# Altium PCB DAP-PCB.PcbDoc (part 3 of 5)
Units mm, origin at the board's own origin, x right, y up, seen from the top; angles counter-clockwise.
Board outline 54.75 x 54.75 mm, 6 copper layers (L1 (SIG/PWR), L2 (GND), L3 (SIG), L4 (PWR), L5 (GND), L6 (SIG/PWR)), stack 1.65 mm thick; 270 components, 172 nets, 891 pads, 308 vias.
Unrouted connection lines stored in the file: 5.
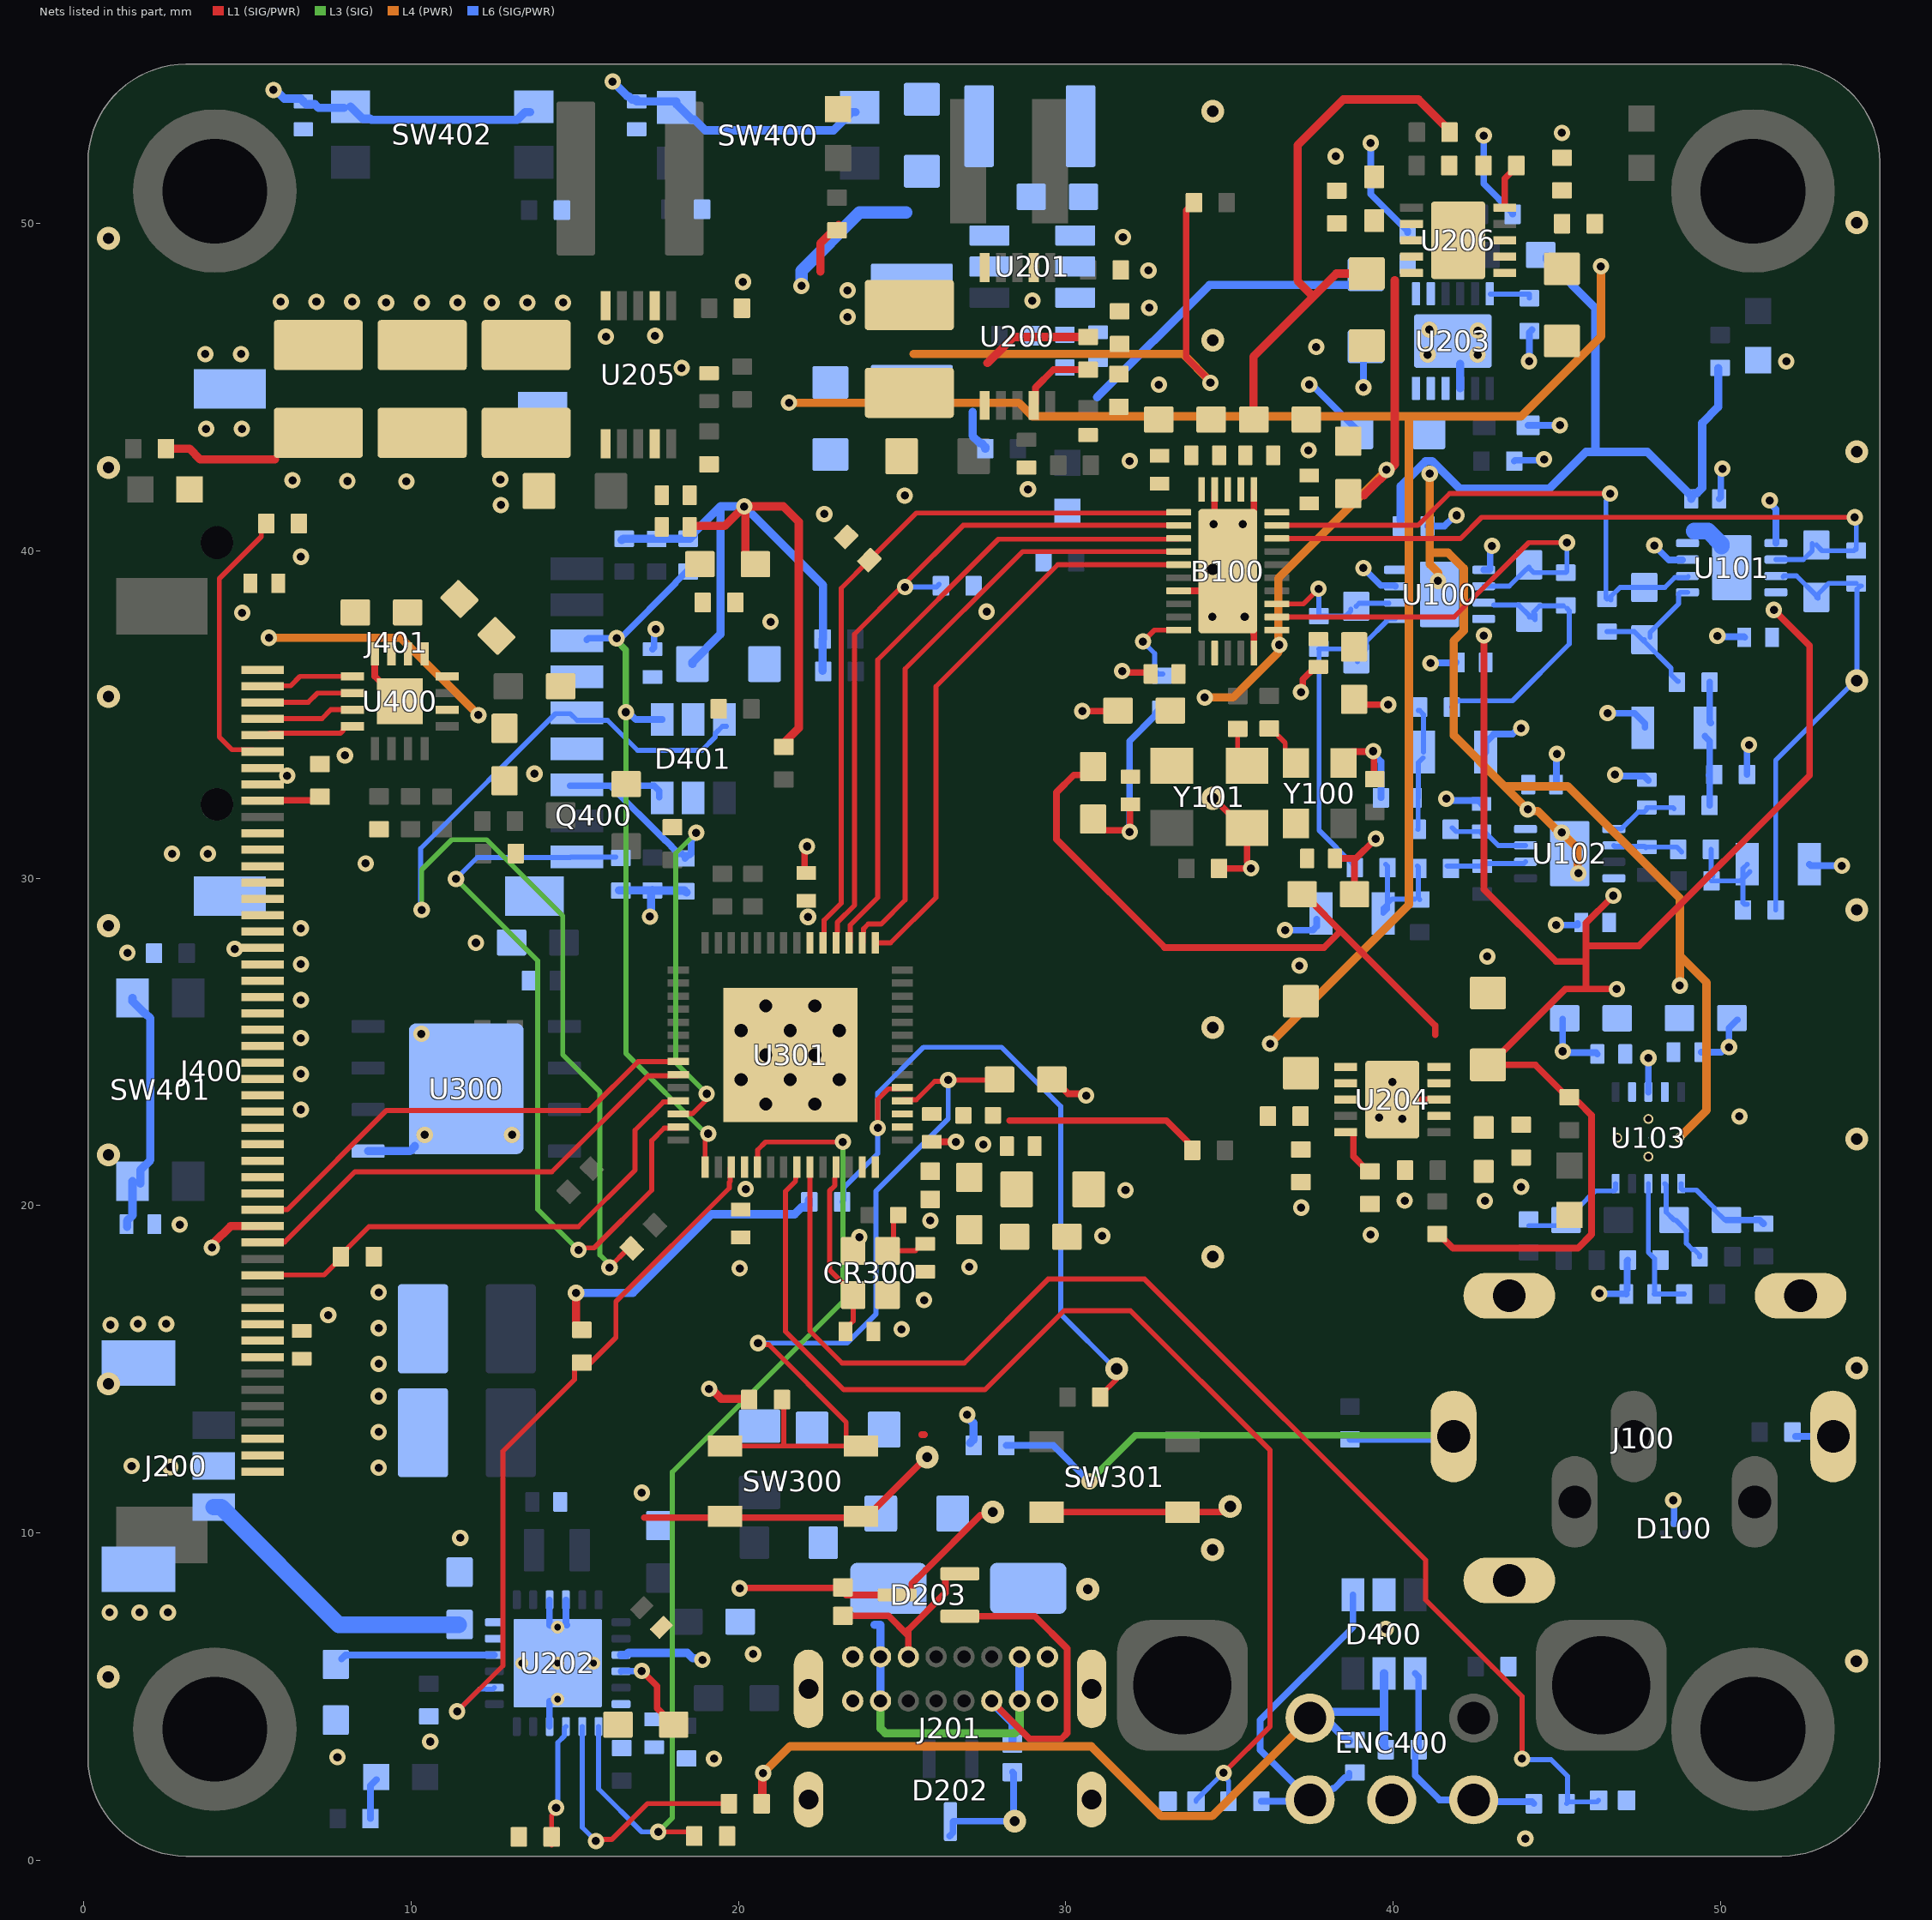
[diagram p6: the nets of this part, all layers, seen from the top]

## Part data (continued)
J400: library part #1-117, <Value>=50-Pin, Manufacturer 1="Amphenol ICC", Manufacturer Part Number 1=F32D-1A7Y1-21050, Package=None, Supplier Part Number 1=609-F32D-1A7Y1-21050CT-ND, <Footprint>=R/A, <Termination>=SMD, AL-PN=#1-117, Check_prices=https://www.snapeda.com/parts/F32D-1A7Y1-21050/Amphenol+FCI/view-part/?ref=eda, Creator Project=DAP, Lead Time="13 Weeks", MF="Amphenol ICC (FCI)", MP=F32D-1A7Y1-21050, PartType=Connector, SnapEDA_Link=https://www.snapeda.com/parts/F32D-1A7Y1-21050/Amphenol+FCI/view-part/?ref=snap, Status=Verified, SubType=FFC, Supplier 1=Digikey, Supplier Label="50 Position FFC, FPC Connector Contacts, Top and Bottom 0.020\" (0.50mm) Surface Mount, Right Angle", Type=Standard
J401: library part #1-126, Manufacturer 1="Same Sky", Manufacturer Part Number 1=MSD-1-A, Package=None, Supplier Part Number 1=2223-MSD-1-ACT-ND, <Termination>=SMD, AL-PN=#1-126, Check_prices=https://www.snapeda.com/parts/MSD-1-A/Same+Sky/view-part/?ref=eda, Creator Project=DAP, Lead Time="8 Weeks", MF="Same Sky", MP=MSD-1-A, PartType=Connector, SnapEDA_Link=https://www.snapeda.com/parts/MSD-1-A/Same+Sky/view-part/?ref=snap, Status=Verified, SubType=Micro-SD, Supplier 1=Digikey, Supplier Label="9 (8 + 1) Position Card Connector microSD™ Surface Mount, Right Angle Gold", Type=Standard
L200: library part #1-076, <Rating>=3.5A, <Tolerance>=0.2, <Value>=6.8uH, Manufacturer 1="Bourns Inc.", Manufacturer Part Number 1=SRP4030FA-6R8M, Supplier Part Number 1=SRP4030FA-6R8MCT-ND, <Spec>=74.1mOhm, <Termination>=SMD, AL-PN=#1-076, Creator Project=DAP, Lead Time="22 Weeks", PartType=Inductor, Status=Verified, SubType=Shielded, Supplier 1=Digikey, Supplier Label="6.8 µH Shielded Drum Core, Wirewound Inductor 4 A 74.1mOhm Max Nonstandard", Type=Standard
L201 L202: library part #1-090, <Rating>=400mA, <Tolerance>=0.2, <Value>=22uH, Manufacturer 1="Murata Electronics", Manufacturer Part Number 1=490-LQW32FT220M2HLTR, Supplier Part Number 1=490-LQW32FT220M2HLCT-ND, <Footprint>=1210, <Spec>=810mOhm, <Termination>=SMD, AL-PN=#1-090, Creator Project=DAP, Lead Time="25 Weeks", PartType=Inductor, Status=Verified, SubType=Shielded, Supplier 1=Digikey, Supplier Label="22 µH Shielded Wirewound Inductor 300 mA 810mOhm Max 1210 (3225 Metric)", Type=Standard
L203: library part #1-063, <Rating>=2A, <Tolerance>=0.2, <Value>=1.0uH, Manufacturer 1=TDK, Manufacturer Part Number 1=TFM141206BLE-1R0MTCA, Supplier Part Number 1=445-TFM141206BLE-1R0MTCACT-ND, <Footprint>=0505, <Spec>=96mOhm, <Termination>=SMD, AL-PN=#1-063, Creator Project=DAP, Lead Time="20 Weeks", PartType=Inductor, Status=Verified, SubType=Shielded, Supplier 1=Digikey, Supplier Label="1 µH Shielded Thin Film Inductor 2 A 96mOhm Max 0505 (1412 Metric)", Type=Standard
L204: library part #1-094, <Rating>=3.7A, <Tolerance>=0.2, <Value>=18uH, Manufacturer 1=Coilcraft, Manufacturer Part Number 1=XGL5050-183MEC, Supplier Part Number 1=2457-XGL5050-183MEC-ND, <Spec>=62.5mOhm, <Termination>=SMD, AL-PN=#1-094, Creator Project=DAP, Lead Time=N/A, PartType=Inductor, Status=Verified, SubType=Shielded, Supplier 1=Digikey, Supplier Label="18 µH Shielded Molded Inductor 4.5 A 62.5mOhm Max Nonstandard", Type=Standard
L300: library part #1-121, <Rating>=1A, <Value>=2nH, Manufacturer 1=TDK, Manufacturer Part Number 1=MHQ1005075HA2N0BTD25, Supplier Part Number 1=445-MHQ1005075HA2N0BTD25CT-ND, <Footprint>=0402, <Spec>=50mOhm, <Termination>=SMD, AL-PN=#1-121, Creator Project=DAP, Lead Time="12 Weeks", PartType=Inductor, Status=Verified, SubType=Shielded, Supplier 1=Digikey, Supplier Label="2 nH Shielded Multilayer Inductor 1 A 50mOhm Max 0402 (1005 Metric)", Type=Standard
L301: library part #1-120, <Rating>=250mA, <Tolerance>=0.03, <Value>=24nH, Manufacturer 1=TDK, Manufacturer Part Number 1=MHQ1005075HA24NHTD25, Supplier Part Number 1=445-MHQ1005075HA24NHTD25CT-ND, <Footprint>=0402, <Spec>=700mOhm, <Termination>=SMD, AL-PN=#1-120, Creator Project=DAP, Lead Time="12 Weeks", PartType=Inductor, Status=Verified, SubType=Shielded, Supplier 1=Digikey, Supplier Label="24 nH Shielded Multilayer Inductor 250 mA 700mOhm Max 0402 (1005 Metric)", Type=Standard
Q400: library part #1-130, <Rating>=2.5Vgs, <Value>=N-Type, Manufacturer 1=MCC, Manufacturer Part Number 1=2N7002-TP, Package="TO-236 MCC", Supplier Part Number 1=2N7002-TPMSCT-ND, <Termination>=SMD, AL-PN=#1-130, Check_prices=https://www.snapeda.com/parts/2N7002-TP/Micro+Commercial/view-part/?ref=eda, Creator Project=DAP, Lead Time=N/A, MF="Micro Commercial", MP=2N7002-TP, PartType=Transistor, SnapEDA_Link=https://www.snapeda.com/parts/2N7002-TP/Micro+Commercial/view-part/?ref=snap, Status=Verified, SubType=MOSFET, Supplier 1=Digikey, Supplier Label="N-Channel 60 V 115mA (Ta) 1.08W Surface Mount SOT-23", Type=Standard
R100 R101 R102 R103 R116 R117 R121 R123 R131 R134: library part #1-105, <Rating>=1/16W, <Tolerance>=0.001, <Value>=499Ohm, Manufacturer 1=YAGEO, Manufacturer Part Number 1=RT0402BRD07499RL, Supplier Part Number 1=YAG1440CT-ND, <Footprint>=0402, <Termination>=SMD, AL-PN=#1-105, Creator Project=DAP, Lead Time="23 Weeks", PartType=Resistor, Status=Verified, Supplier 1=Digikey, Supplier Label="499 Ohms ±0.1% 0.063W, 1/16W Chip Resistor 0402 (1005 Metric) Thin Film", Type=Standard
R104 R105 R303 R304 R305 R306 R307: library part #1-102, <Rating>=1/16W, <Tolerance>=0.01, <Value>=22Ohm, Manufacturer 1=YAGEO, Manufacturer Part Number 1=RC0402FR-0722RL, Supplier Part Number 1=311-22.0LRCT-ND, <Footprint>=0402, <Termination>=SMD, AL-PN=#1-102, Creator Project=DAP, Lead Time="22 Weeks", PartType=Resistor, Status=Verified, Supplier 1=Digikey, Supplier Label="22 Ohms ±1% 0.063W, 1/16W Chip Resistor 0402 (1005 Metric) Moisture Resistant Thick Film", Type=Standard
R106 R107 R111 R112 R113 R119 R129 R135 R208 R209 R210 R211 R216 R221 R223 R242 R300 R301 R400 R401 R402 R403 R404 R405 R406 R407 R408 R412 R413 R414 R415 R416 R417 R418 R419 R422: library part #1-134, <Tolerance>=0.01, <Value>=10kOhm, Manufacturer 1=YAGEO, Manufacturer Part Number 1=AC0402FR-0710KL, Supplier Part Number 1=YAG3436CT-ND, <Footprint>=0402, <Termination>=SMD, AL-PN=#1-134, Creator Project=DAP, Lead Time="22 Weeks", PartType=Resistor, Status=Verified, Supplier 1=Digikey, Supplier Label="10 kOhms ±1% 0.063W, 1/16W Chip Resistor 0402 (1005 Metric) Automotive AEC-Q200, Moisture Resistant Thick Film", Type=Standard
R108 R207 R226 R231 R238 R247: library part #1-138, <Tolerance>=0.001, <Value>=49.9kOhm, Manufacturer 1=YAGEO, Manufacturer Part Number 1=RT0402BRD0749K9L, Supplier Part Number 1=YAG4270CT-ND, <Footprint>=0402, <Termination>=SMD, AL-PN=#1-138, Creator Project=DAP, Lead Time="23 Weeks", PartType=Resistor, Status=Verified, Supplier 1=Digikey, Supplier Label="49.9 kOhms ±0.1% 0.063W, 1/16W Chip Resistor 0402 (1005 Metric) Thin Film", Type=Standard
R114 R115 R126 R133: library part #1-109, <Rating>=1/16W, <Tolerance>=0.001, <Value>=220Ohm, Manufacturer 1=YAGEO, Manufacturer Part Number 1=RT0402BRD07220RL, Supplier Part Number 1=YAG4207CT-ND, <Footprint>=0402, <Termination>=SMD, AL-PN=#1-109, Creator Project=DAP, Lead Time="23 Weeks", PartType=Resistor, Status=Verified, Supplier 1=Digikey, Supplier Label="220 Ohms ±0.1% 0.063W, 1/16W Chip Resistor 0402 (1005 Metric) Thin Film", Type=Standard
R118 R204 R205 R212 R228 R239 R240 R241 R245 R420 R421 R424 R425: library part #1-131, <Tolerance>=0.01, <Value>=100kOhm, Manufacturer 1=YAGEO, Manufacturer Part Number 1=RT0402BRD07100KL, Supplier Part Number 1=YAG1343CT-ND, <Footprint>=0402, <Termination>=SMD, AL-PN=#1-131, Creator Project=DAP, Lead Time="23 Weeks", PartType=Resistor, Status=Verified, Supplier 1=Digikey, Supplier Label="100 kOhms ±0.1% 0.063W, 1/16W Chip Resistor 0402 (1005 Metric) Thin Film", Type=Standard
R120 R122 R124 R132: library part #1-110, <Rating>=1/16W, <Tolerance>=0.001, <Value>=681Ohm, Manufacturer 1=YAGEO, Manufacturer Part Number 1=RT0402BRD07681RL, Supplier Part Number 1=YAG1466CT-ND, <Footprint>=0402, <Termination>=SMD, AL-PN=#1-110, Creator Project=DAP, Lead Time="23 Weeks", PartType=Resistor, Status=Verified, Supplier 1=Digikey, Supplier Label="681 Ohms ±0.1% 0.063W, 1/16W Chip Resistor 0402 (1005 Metric) Thin Film", Type=Standard
R125 R127: library part #1-113, <Rating>=1/16W, <Tolerance>=0.001, <Value>=4.7Ohm, Manufacturer 1=YAGEO, Manufacturer Part Number 1=RT0402BRE074R7L, Supplier Part Number 1=13-RT0402BRE074R7LCT-ND, <Footprint>=0402, <Termination>=SMD, AL-PN=#1-113, Creator Project=DAP, Lead Time="23 Weeks", PartType=Resistor, Status=Verified, Supplier 1=Digikey, Supplier Label="4.7 Ohms ±0.1% 0.063W, 1/16W Chip Resistor 0402 (1005 Metric) Thin Film", Type=Standard
R128 R203 R237: library part #1-079, <Rating>=1/16W, <Tolerance>=0.001, <Value>=54.9kOhm, Manufacturer 1=YAGEO, Manufacturer Part Number 1=RT0402BRD0754K9L, Supplier Part Number 1=YAG1452CT-ND, <Footprint>=0402, <Termination>=SMD, AL-PN=#1-079, Creator Project=DAP, Lead Time="20 Weeks", PartType=Resistor, Status=Verified, Supplier 1=Digikey, Supplier Label="54.9 kOhms ±0.1% 0.063W, 1/16W Chip Resistor 0402 (1005 Metric) Thin Film", Type=Standard
R200: library part #1-074, <Rating>=1/16W, <Tolerance>=0.001, <Value>=220kOhm, Manufacturer 1=YAGEO, Manufacturer Part Number 1=RC0402BR-07220KL, Supplier Part Number 1=13-RC0402BR-07220KLCT-ND, <Footprint>=0402, <Termination>=SMD, AL-PN=#1-074, Creator Project=DAP, Lead Time="17 Weeks", PartType=Resistor, Status=Verified, Supplier 1=Digikey, Supplier Label="220 kOhms ±0.1% 0.063W, 1/16W Chip Resistor 0402 (1005 Metric) Moisture Resistant Thick Film", Type=Standard
R201: library part #1-091, <Rating>=1/16W, <Tolerance>=0.001, <Value>=309kOhm, Manufacturer 1=YAGEO, Manufacturer Part Number 1=RE0402BRE07309KL, Supplier Part Number 1=13-RE0402BRE07309KLCT-ND, <Footprint>=0402, <Termination>=SMD, AL-PN=#1-091, Creator Project=DAP, Lead Time="20 Weeks", PartType=Resistor, Status=Verified, Supplier 1=Digikey, Supplier Label="309 kOhms ±0.1% 0.063W, 1/16W Chip Resistor 0402 (1005 Metric) Thick Film", Type=Standard
R202: library part #1-067, <Rating>=0.1W, <Tolerance>=0.005, <Value>=274kOhm, Manufacturer 1=YAGEO, Manufacturer Part Number 1=RT0603DRE07274KL, Supplier Part Number 1=13-RT0603DRE07274KLCT-ND, <Footprint>=0603, <Termination>=SMD, AL-PN=#1-067, Creator Project=DAP, Lead Time="20 Weeks", PartType=Resistor, Status=Verified, Supplier 1=Digikey, Supplier Label="RES SMD 274K OHM 0.5% 1/10W 0603", Type=Standard
R206 R229 R246 R249 R250 R251 R252 R253 R302: library part #1-043, <Rating>=1/16W, <Tolerance>=0.001, <Value>=1kOhm, Manufacturer 1=YAGEO, Manufacturer Part Number 1=RT0402BRD071KL, Supplier Part Number 1=YAG1386TR-ND, <Footprint>=0402, <Termination>=SMD, AL-PN=#1-043, Creator Project=aRTy, Lead Time="20 Weeks", PartType=Resistor, Status=Verified, Supplier 1=Digikey, Supplier Label="1 kOhms ±0.1% 0.063W, 1/16W Chip Resistor 0402 (1005 Metric) Thin Film", Type=Standard
R213 R224: library part #1-078, <Rating>=1/16W, <Tolerance>=0.001, <Value>=15kOhm, Manufacturer 1=YAGEO, Manufacturer Part Number 1=RT0402BRD0715KL, Supplier Part Number 1=YAG2302CT-ND, <Footprint>=0402, <Termination>=SMD, AL-PN=#1-078, Creator Project=DAP, Lead Time="20 Weeks", PartType=Resistor, Status=Verified, Supplier 1=Digikey, Supplier Label="15 kOhms ±0.1% 0.063W, 1/16W Chip Resistor 0402 (1005 Metric) Thin Film", Type=Standard
R214: library part #1-060, <Rating>=1/16W, <Tolerance>=0.01, <Value>=5kOhm, Manufacturer 1=YAGEO, Manufacturer Part Number 1=RC0402FR-075KL, Supplier Part Number 1=13-RC0402FR-075KLCT-ND, <Footprint>=0402, <Termination>=SMD, AL-PN=#1-060, Creator Project=DAP, Lead Time="17 Weeks", PartType=Resistor, Status=Verified, Supplier 1=Digikey, Supplier Label="5 kOhms ±1% 0.063W, 1/16W Chip Resistor 0402 (1005 Metric) Moisture Resistant Thick Film", Type=Standard
R215: library part #1-061, <Rating>=1/16W, <Tolerance>=0.005, <Value>=9.88kOhm, Manufacturer 1=YAGEO, Manufacturer Part Number 1=RT0402DRD079K88L, Supplier Part Number 1=311-2214-1-ND, <Footprint>=0402, <Termination>=SMD, AL-PN=#1-061, Creator Project=DAP, Lead Time="20 Weeks", PartType=Resistor, Status=Verified, Supplier 1=Digikey, Supplier Label="9.88 kOhms ±0.5% 0.063W, 1/16W Chip Resistor 0402 (1005 Metric) Thin Film", Type=Standard
R217: library part #1-065, <Rating>=0.1W, <Tolerance>=0.01, <Value>=270Ohm, Manufacturer 1=YAGEO, Manufacturer Part Number 1=RC0603FR-07270RL, Supplier Part Number 1=311-270HRCT-ND, <Footprint>=0603, <Termination>=SMD, AL-PN=#1-065, Creator Project=DAP, Lead Time="17 Weeks", PartType=Resistor, Status=Verified, Supplier 1=Digikey, Supplier Label="270 Ohms ±1% 0.1W, 1/10W Chip Resistor 0603 (1608 Metric) Moisture Resistant Thick Film", Type=Standard
R218: library part #1-064, <Rating>=0.1W, <Tolerance>=0.001, <Value>=500Ohm, Manufacturer 1=YAGEO, Manufacturer Part Number 1=RT0603BRC07500RL, Supplier Part Number 1=13-RT0603BRC07500RLCT-ND, <Footprint>=0603, <Termination>=SMD, AL-PN=#1-064, Creator Project=DAP, Lead Time="20 Weeks", PartType=Resistor, Status=Verified, Supplier 1=Digikey, Supplier Label="500 Ohms ±0.1% 0.1W, 1/10W Chip Resistor 0603 (1608 Metric) Thin Film", Type=Standard
R219: library part #1-087, <Rating>=1/16W, <Tolerance>=0.01, <Value>=88.7kOhm, Manufacturer 1=YAGEO, Manufacturer Part Number 1=RC0402FR-0788K7L, Supplier Part Number 1=311-88.7KLRCT-ND, <Footprint>=0402, <Termination>=SMD, AL-PN=#1-087, Creator Project=DAP, Lead Time="17 Weeks", PartType=Resistor, Status=Verified, Supplier 1=Digikey, Supplier Label="88.7 kOhms ±1% 0.063W, 1/16W Chip Resistor 0402 (1005 Metric) Moisture Resistant Thick Film", Type=Standard
R220: library part #1-086, <Rating>=1/10W, <Tolerance>=0.001, <Value>=135kOhm, Manufacturer 1=YAGEO, Manufacturer Part Number 1=RT0603BRD07135KL, Supplier Part Number 1=13-RT0603BRD07135KLCT-ND, <Footprint>=0603, <Termination>=SMD, AL-PN=#1-086, Creator Project=DAP, Lead Time="20 Weeks", PartType=Resistor, Status=Verified, Supplier 1=Digikey, Supplier Label="135 kOhms ±0.1% 0.1W, 1/10W Chip Resistor 0603 (1608 Metric) Thin Film", Type=Standard
R222 R243: library part #1-083, <Rating>=1/16W, <Tolerance>=0.01, <Value>=909kOhm, Manufacturer 1=YAGEO, Manufacturer Part Number 1=RC0402FR-07909KL, Supplier Part Number 1=YAG2377CT-ND, <Footprint>=0402, <Termination>=SMD, AL-PN=#1-083, Creator Project=DAP, Lead Time="17 Weeks", PartType=Resistor, Status=Verified, Supplier 1=Digikey, Supplier Label="909 kOhms ±1% 0.063W, 1/16W Chip Resistor 0402 (1005 Metric) Moisture Resistant Thick Film", Type=Standard
R225 R244: library part #1-084, <Rating>=1/16W, <Tolerance>=0.001, <Value>=90.9kOhm, Manufacturer 1=YAGEO, Manufacturer Part Number 1=RT0402BRD0790K9L, Supplier Part Number 1=YAG1489CT-ND, <Footprint>=0402, <Termination>=SMD, AL-PN=#1-084, Creator Project=DAP, Lead Time="20 Weeks", PartType=Resistor, Status=Verified, Supplier 1=Digikey, Supplier Label="90.9 kOhms ±0.1% 0.063W, 1/16W Chip Resistor 0402 (1005 Metric) Thin Film", Type=Standard
R227: library part #1-097, <Rating>=1/4W, <Tolerance>=0.01, <Value>=0.5Ohms, Manufacturer 1=YAGEO, Manufacturer Part Number 1=PE0805FRF7W0R5L, Supplier Part Number 1=13-PE0805FRF7W0R5LCT-ND, <Footprint>=0805, <Termination>=SMD, AL-PN=#1-097, Creator Project=DAP, Lead Time="20 Weeks", PartType=Resistor, Status=Verified, Supplier 1=Digikey, Supplier Label="500 mOhms ±1% 0.25W, 1/4W Chip Resistor 0805 (2012 Metric) Automotive AEC-Q200, Current Sense Metal Film", Type=Standard
R230: library part #1-088, <Rating>=1/16W, <Tolerance>=0.01, <Value>=15.4kOhm, Manufacturer 1=YAGEO, Manufacturer Part Number 1=RT0402BRD0715K4L, Supplier Part Number 1=YAG4177CT-ND, <Footprint>=0402, <Termination>=SMD, AL-PN=#1-088, Creator Project=DAP, Lead Time="20 Weeks", PartType=Resistor, Status=Verified, Supplier 1=Digikey, Supplier Label="15.4 kOhms ±0.1% 0.063W, 1/16W Chip Resistor 0402 (1005 Metric) Thin Film", Type=Standard
R232 R233 R248: library part #1-085, <Rating>=1/16W, <Tolerance>=0.001, <Value>=33.2kOhm, Manufacturer 1=YAGEO, Manufacturer Part Number 1=RT0402BRD0733K2L, Supplier Part Number 1=YAG4244CT-ND, <Footprint>=0402, <Termination>=SMD, AL-PN=#1-085, Creator Project=DAP, Lead Time="20 Weeks", PartType=Resistor, Status=Verified, Supplier 1=Digikey, Supplier Label="33.2 kOhms ±0.1% 0.063W, 1/16W Chip Resistor 0402 (1005 Metric) Thin Film", Type=Standard
R234 R235: library part #1-024, <Rating>=1/16W, <Tolerance>=0.001, <Value>=5.1kOhm, Manufacturer 1=YAGEO, Manufacturer Part Number 1=RT0402BRE075K1L, Supplier Part Number 1=YAG4404TR-ND, <Footprint>=0402, <Termination>=SMD, AL-PN=#1-024, Creator Project=aRTy, Lead Time="20 Weeks", PartType=Resistor, Status=Verified, Supplier 1=Digikey, Supplier Label="5.1 kOhms ±0.1% 0.063W, 1/16W Chip Resistor 0402 (1005 Metric) Thin Film", Type=Standard
R236: library part #1-095, <Rating>=1/10W, <Tolerance>=0.001, <Value>=172kOhm, Manufacturer 1=YAGEO, Manufacturer Part Number 1=RT0603BRD07172KL, Supplier Part Number 1=13-RT0603BRD07172KLCT-ND, <Footprint>=0603, <Termination>=SMD, AL-PN=#1-095, Creator Project=DAP, Lead Time="20 Weeks", PartType=Resistor, Status=Verified, Supplier 1=Digikey, Supplier Label="172 kOhms ±0.1% 0.1W, 1/10W Chip Resistor 0603 (1608 Metric) Thin Film", Type=Standard
R308: library part #1-123, <Rating>=1/16W, <Tolerance>=0.001, <Value>=1MOhm, Manufacturer 1=YAGEO, Manufacturer Part Number 1=RE0402BRE071ML, Supplier Part Number 1=13-RE0402BRE071MLCT-ND, <Footprint>=0402, <Termination>=SMD, AL-PN=#1-123, Creator Project=DAP, Lead Time="20 Weeks", PartType=Resistor, Status=Verified, Supplier 1=Digikey, Supplier Label="1 MOhms ±0.1% 0.063W, 1/16W Chip Resistor 0402 (1005 Metric) Thick Film", Type=Standard
R423: library part #1-133, <Tolerance>=0.01, <Value>=32.4kOhm, Manufacturer 1=YAGEO, Manufacturer Part Number 1=RC0402FR-0732K4L, Supplier Part Number 1=YAG3119CT-ND, <Footprint>=0402, <Termination>=SMD, AL-PN=#1-133, Creator Project=DAP, Lead Time="22 Weeks", PartType=Resistor, Status=Verified, Supplier 1=Digikey, Supplier Label="32.4 kOhms ±1% 0.063W, 1/16W Chip Resistor 0402 (1005 Metric) Moisture Resistant Thick Film", Type=Standard
SW300 SW301: library part #1-115, <Value>=SPST, Manufacturer 1=C&K, Manufacturer Part Number 1="PTS810SJM250SMTR LFS", Package=None, Supplier Part Number 1=CKN10502CT-ND, <Footprint>=Vert, <Termination>=SMD, AL-PN=#1-115, Check_prices=https://www.snapeda.com/parts/PTS810%20SJM%20250%20SMTR%20LFS/C%2526K/view-part/?ref=eda, Creator Project=DAP, Lead Time="16 Weeks", MF=C&K, MP="PTS810 SJM 250 SMTR LFS", PartType=Switch, SnapEDA_Link=https://www.snapeda.com/parts/PTS810%20SJM%20250%20SMTR%20LFS/C%2526K/view-part/?ref=snap, Status=Verified, SubType=Tacticle, Supplier 1=Digikey, Supplier Label="Tactile Switch SPST-NO Top Actuated Surface Mount", Type=Standard
SW400 SW401 SW402: library part #1-114, <Value>=SPST, Manufacturer 1=E-Switch, Manufacturer Part Number 1=TL1014BF220QG, Supplier Part Number 1=141-TL1014BF220QGCT-ND, <Footprint>=R/A, <Termination>=SMD, AL-PN=#1-114, Creator Project=DAP, Lead Time="7 Weeks", PartType=Switch, Status=Verified, SubType=Tacticle, Supplier 1=Digikey, Supplier Label="Tactile Switch SPST-NO Side Actuated Surface Mount, Right Angle", Type=Standard
U100 U101 U102: library part #1-104, Manufacturer 1="Texas Instruments", Manufacturer Part Number 1=OPA1612AIDRGR, Supplier Part Number 1=296-38367-1-ND, <Termination>=SMD, AL-PN=#1-104, Creator Project=DAP, Lead Time="16 Weeks", PartType=IC, Status=Verified, SubType=Op-Amp, Supplier 1=Digikey, Supplier Label="Audio Amplifier 2 Circuit Rail-to-Rail 8-SON (3x3)", Type=Standard
U103: library part #1-056, Manufacturer 1="Texas Instruments", Manufacturer Part Number 1=OPA1622IDRCR, Package="VSON-10 Texas Instruments", Supplier Part Number 1=296-45038-1-ND, <Termination>=SMD, AL-PN=#1-056, Check_prices=https://www.snapeda.com/parts/OPA1622IDRCR/Texas+Instruments/view-part/?ref=eda, Creator Project=DAP, Lead Time="16 Weeks", MF="Texas Instruments", MP=OPA1622IDRCR, PartType=IC, SnapEDA_Link=https://www.snapeda.com/parts/OPA1622IDRCR/Texas+Instruments/view-part/?ref=snap, Status=Verified, SubType=Op-Amp, Supplier 1=Digikey, Supplier Label="Audio Amplifier 2 Circuit 10-VSON (3x3)", Type=Standard
U200 U205: library part #1-050, Manufacturer 1="Analog Devices", Manufacturer Part Number 1=LTC3440EMS#TRPBF, Package="MSOP-10 Linear Technology", Supplier Part Number 1=LTC3440EMS#TRPBFCT-ND, <Termination>=SMD, AL-PN=#1-050, Check_prices=https://www.snapeda.com/parts/LTC3440EMS%23TRPBF/Analog+Devices/view-part/?ref=eda, Creator Project=DAP, Lead Time="21 Weeks", MF="Analog Devices", MP=LTC3440EMS#TRPBF, PartType=IC, SnapEDA_Link=https://www.snapeda.com/parts/LTC3440EMS%23TRPBF/Analog+Devices/view-part/?ref=snap, Status=Verified, SubType=Buck-Boost, Supplier 1=Digikey, Supplier Label="Buck-Boost Switching Regulator IC Positive Adjustable 2.5V 1 Output 600mA 10-TFSOP, 10-MSOP (0.118\", 3.00mm Width)", Type=Standard
U201: library part #1-089, Manufacturer 1="Analog Devices", Manufacturer Part Number 1=LT3462AES6#TRPBF, Manufacturer_Name="Analog Devices Inc", Manufacturer_Part_Number=LT3093EDD#TRPBF, Supplier Part Number 1=LT3462AES6#TRPBFCT-ND, <Termination>=SMD, AL-PN=#1-089, Copyright="Copyright (C) 2026 Ultra Librarian. All rights reserved.", Creator Project=DAP, Lead Time="10 Weeks", PartType=IC, RefDes=RefDes, Status=Verified, SubType=Regulator, Supplier 1=Digikey, Supplier Label="Cuk Switching Regulator IC Negative Adjustable -1.265V 1 Output 250mA SOT-23-6 Thin, TSOT-23-6", Type=Standard
U202: library part #1-054, Manufacturer 1="Texas Instruments", Manufacturer Part Number 1=BQ24250RGET, Package="VQFN-24 Texas Instruments", Supplier Part Number 1=296-36180-1-ND, <Termination>=SMD, AL-PN=#1-054, Check_prices=https://www.snapeda.com/parts/BQ24250RGET/Texas+Instruments/view-part/?ref=eda, Creator Project=DAP, Lead Time="16 Weeks", MF="Texas Instruments", MP=BQ24250RGET, PartType=IC, SnapEDA_Link=https://www.snapeda.com/parts/BQ24250RGET/Texas+Instruments/view-part/?ref=snap, Status=Verified, SubType=Charger, Supplier 1=Digikey, Supplier Label="Charger IC Lithium Ion 24-VQFN (4x4)", Type=Standard
U203: library part #1-052, Manufacturer 1="Analog Devices", Manufacturer Part Number 1=LT3093EDD#TRPBF, Manufacturer_Name="Analog Devices Inc", Supplier Part Number 1=505-LT3093EDD#TRPBFCT-ND, <Termination>=SMD, AL-PN=#1-052, Copyright="Copyright (C) 2026 Ultra Librarian. All rights reserved.", Creator Project=DAP, Lead Time="21 Weeks", Manufacturer_Part_Number=LT3093EDD#TRPBF, PartType=IC, RefDes=RefDes, Status=Verified, SubType=LDO, Supplier 1=Digikey, Supplier Label="Linear Voltage Regulator IC Negative Adjustable 1 Output 200mA 12-DFN (3x3)", Type=Standard
U204 U206: library part #1-051, Manufacturer 1="Analog Devices", Manufacturer Part Number 1=LT3042EDD#PBF, Package="DFN-10 Linear Technology", Supplier Part Number 1=505-LT3042EDD#PBF-ND, <Termination>=SMD, AL-PN=#1-051, Check_prices=https://www.snapeda.com/parts/LT3042EDD%23PBF/Analog+Devices/view-part/?ref=eda, Creator Project=DAP, Lead Time="21 Weeks", MF="Analog Devices", MP=LT3042EDD#PBF, PartType=IC, SnapEDA_Link=https://www.snapeda.com/parts/LT3042EDD%23PBF/Analog+Devices/view-part/?ref=snap, Status=Verified, SubType=LDO, Supplier 1=Digikey, Supplier Label="Linear Voltage Regulator IC Positive Adjustable 1 Output 200mA 10-DFN (3x3)", Type=Standard
U300: library part #1-124, <Rating>=133MHz, <Value>=64Bit, Manufacturer 1="Gigadevice Electronics Singapore PTE.LTD.", Manufacturer Part Number 1=GD25B64EWIGR, Supplier Part Number 1=1970-GD25B64EWIGRCT-ND, <Termination>=SMD, AL-PN=#1-124, Creator Project=DAP, Lead Time=N/A, PartType=IC, Status=Verified, SubType=FLASH, Supplier 1=Digikey, Supplier Label="FLASH - NOR (SLC) Memory IC 64Mbit SPI - Quad I/O 133 MHz 7 ns 8-WSON (5x6)", Type=Standard
U301: library part #1-055, Manufacturer 1="Espressif Technologies", Package=None, Supplier Part Number 1=1965-ESP32-S3-ND, <Termination>=SMD, AL-PN=#1-055, Availability="In Stock", Check_prices=https://www.snapeda.com/parts/ESP32-S3/Espressif+Systems/view-part/?ref=eda, Creator Project=DAP, Lead Time="8 Weeks", Manufacturer Part Number 1=ESP32-S3, MF="Espressif Systems", MP=ESP32-S3, PartType=MCU, Price=None, Purchase-URL=https://pricing.snapeda.com/search/part/ESP32-S3/?ref=eda, SnapEDA_Link=https://www.snapeda.com/parts/ESP32-S3/Espressif+Systems/view-part/?ref=snap, Status=Verified, SubType=ESP-32, Supplier 1=Digikey, Supplier Label="IC RF TxRx + MCU Bluetooth, WiFi 802.11b/g/n, Bluetooth v5.0 2.412GHz ~ 2.484GHz 56-VFQFN Exposed Pad", Type=Standard
U400: library part #1-128, Manufacturer 1="Rohm Semiconductor", Manufacturer Part Number 1=BD1604MUV-E2, Manufacturer_Name="ROHM Semiconductor", Supplier Part Number 1=BD1604MUV-E2CT-ND, <Termination>=SMD, AL-PN=#1-128, Copyright="Copyright (C) 2025 Ultra Librarian. All rights reserved.", Creator Project=DAP, Lead Time="12 Weeks", Manufacturer_Part_Number=BD1604MUV-E2, PartType=IC, RefDes=RefDes, Status=Verified, SubType="LED Driver", Supplier 1=Digikey, Supplier Label="LED Driver IC 4 Output DC DC Regulator Switched Capacitor (Charge Pump) Dimming 30mA VQFN016V3030", Type=Standard
Y100: library part #1-100, <Rating>=2.2mA, <Value>=22.5792MHz, Manufacturer 1="ECS Inc.", Manufacturer Part Number 1=ECS-2520MVLC-225.792-CN-TR, Package=None, Supplier Part Number 1=50-ECS-2520MVLC-225.792-CN-TRCT-ND, <Termination>=SMD, AL-PN=#1-100, Availability=Unavailable, Creator Project=DAP, Lead Time="19 Weeks", MP=ASTX-H11-24.576MHZ-T, PartType=Oscillator, Price=None, Status=Verified, SubType=Crystal, Supplier 1=Digikey, Supplier Label="22.5792 MHz XO (Standard) CMOS Oscillator 1.6V ~ 3.6V Enable/Disable 4-SMD, No Lead", Type=Standard
Y101: library part #1-101, <Rating>=5.5mA, <Value>=24.576MHz, Manufacturer 1="Abracon LLC", Manufacturer Part Number 1=ASTX-H11-24.576MHZ-T, Package=None, Supplier Part Number 1=535-12038-1-ND, <Termination>=SMD, AL-PN=#1-101, Availability=Unavailable, Creator Project=DAP, Lead Time="16 Weeks", MP=ASTX-H11-24.576MHZ-T, PartType=Oscillator, Price=None, Status=Verified, SubType=Crystal, Supplier 1=Digikey, Supplier Label="24.576 MHz TCXO HCMOS Oscillator 3.3V Enable/Disable 4-SMD, No Lead", Type=Standard

## Free pads (board coordinates)
  round 5 hole 3.2: ""(4,4) ""(4,51) ""(51,4) ""(51,51)

## Via types
v1: diameter 0.5, hole 0.25, L1 (SIG/PWR) to L6 (SIG/PWR), tented both sides, 268 vias
v2: diameter 0.7, hole 0.35, L1 (SIG/PWR) to L6 (SIG/PWR), tented both sides, 23 vias
v3: diameter 0.7, hole 0.3, L1 (SIG/PWR) to L6 (SIG/PWR), tented both sides, 6 vias
v4: diameter 1.25, hole 0.75, L1 (SIG/PWR) to L6 (SIG/PWR), 6 vias
v5: diameter 0.4/0.4/0.4/0.4/0.4/0.4 (per signal layer), hole 0.2, L1 (SIG/PWR) to L6 (SIG/PWR), tented both sides, 5 vias

## Nets (pads, with @x,y where several pads share a name; then routed paths per layer and width w, separated by ;. In a path a pad name is that pad's centre, name@x,y a point inside that pad or via, vN(x,y) a via of type N, cw(c..) or ccw(c..) an arc to the next point about the centre after c; other vN are vias at no path point)
22.5792_OUT: R104.1 Y100.3 | length 1.3
  L1 (SIG/PWR) w0.152: R104.1@36.22,34.577 36.27,34.577 36.709,34.138 36.709,33.898 36.723,33.884 Y100.3@37.059,33.884
24.576_OUT: R105.2 Y101.3 | length 1.4
  L1 (SIG/PWR) w0.152: R105.2@35.255,34.569 35.255,33.35 Y101.3@35.433,33.35
40MHz_IN: C308.1 CR300.1 L301.1 | length 2.4
  L1 (SIG/PWR) w0.152: CR300.1@24.555,18.621 25.409,18.621 25.584,18.796 C308.1@25.781,18.796 ; CR300.1@24.562,18.669 24.741,18.849 L301.1@24.741,19.709
40MHz_OUT: C310.1 CR300.3 U301.53 | length 5.4
  L1 (SIG/PWR) w0.152: U301.53@22.984,21.178 22.95,21.144 22.95,20.842 22.948,20.839 22.948,20.613 22.784,20.449 22.784,18.043 23.495,17.332 CR300.3@23.495,17.145 ; C310.1@23.266,16.205 23.266,16.235 23.505,16.474 CR300.3@23.505,17.145
+3V3_ANALOG: C102.2 C103.2 C104.2 C105.2 C109.2 C111.2 C126.2 C128.2 C129.2 C217.2 R222.2 R251.2 U100.8 U101.8 U102.8 U103.2 U204.9 U204.10 Y100.4 Y101.4 | length 65.4
  L1 (SIG/PWR) w0.203: C105.2@30.836,33.414 30.58,33.158 30.25,33.158 29.718,32.626 29.718,31.191 33.021,27.888 37.895,27.888 38.398,28.39 ; C102.2@37.465,29.312 37.477,29.312 38.398,28.39 ; 41.291,25.223 41.291,25.498 38.398,28.39 ; R222.2@41.351,19.134 41.401,19.134 41.834,18.702 45.651,18.702 46.069,19.12 46.069,22.76 45.669,23.161 45.588,23.161 45.568,23.181 R251.2@45.568,23.262 ; v1@42.799,37.414 42.778,37.394 42.778,29.662 44.983,27.457 45.898,27.457 ; C217.2@42.901,24.3 44.349,24.3 45.288,23.361 R251.2@45.288,23.292 ; C217.2@42.951,24.3 45.27,26.619 45.898,26.619 ; v1@46.711,29.413 46.677,29.413 45.898,28.634 45.898,27.94 ; v1@46.812,26.619 45.898,26.619 ; v1@51.765,38.227 51.735,38.197 51.735,38.105 52.73,37.109 52.73,33.147 47.523,27.94 45.898,27.94 ; 45.898,26.619 45.898,27.457 ; 45.898,27.457 45.898,27.94
  other v1: 46.838,26.619 46.733,29.47 42.778,37.419 51.638,38.202
+3V3_DAC: B100.1 B100.10 B100.12 B100.27 C112.2 C113.2 C114.2 C115.2 C116.2 C119.2 C120.2 C139.2 C231.2 R243.2 U206.9 U206.10 | length 33.5
  L1 (SIG/PWR) w0.254: C120.2@35.738,44.12 35.738,45.949 37.567,47.777 ; 39.116,41.707 40.052,42.643 40.052,48.279 ; C231.2@39.198,48.48 38.27,48.48 37.567,47.777 ; R243.2@41.808,52.959 41.619,52.959 40.781,53.797 38.481,53.797 37.084,52.4 37.084,48.26 37.567,47.777
  L4 (PWR) w0.254: v1(34.248,35.527) 35.121,35.527 36.5,36.906 36.5,39.179 v1@39.802,42.481
  other v1: 36.525,37.135 39.802,42.481
+3V3_DIG: B100.13 C121.2 C122.2 C225.2 C227.2 C228.2 C229.2 C300.2 C301.2 C303.2 C304.2 C305.2 C306.2 C307.2 C401.2 C402.2 C403.2 C407.2 C408.2 C409.2 D400.5 D401.5 ENC400.4 J400.7 J400.8 J400.35 J400.40 J400.41 J400.42 J401.4 L300.2 R118.2 R208.2 R209.2 R210.2 R211.2 R223.2 R236.2 R241.2 R242.2 R253.2 R300.2 R301.2 R405.2 R407.2 R414.2 R415.2 R416.2 R417.2 R418.2 R419.1 SW400.2 SW400.4 SW401.2 SW401.4 SW402.2 SW402.4 U205.6 U301.20 U301.46 U301.55 U301.56 | length 119.2
  L1 (SIG/PWR) w0.203: 28.293,22.599 33.078,22.599 R223.2@33.807,21.869 ; R242.2@33.866,50.648 33.866,50.598 33.68,50.412 33.68,45.921 34.421,45.181 v1(34.421,45.144)
  L1 (SIG/PWR) w0.254: R253.2@2.565,43.104 2.591,43.129 3.226,43.129 3.556,42.799 5.835,42.799 ; v1(3.912,18.72) 3.959,18.767 3.959,18.853 4.479,19.373 J400.35@5.461,19.373 ; v1(15.038,17.332) 15.038,16.701 15.042,16.698 15.042,16.327 R210.2@15.113,16.256 ; C225.2@18.618,40.767 19.582,40.767 v1(20.18,41.365) ; v1(19.101,14.402) 19.167,14.402 19.472,14.097 20.205,14.097 20.23,14.072 R300.2@20.328,14.072 ; R236.2@20.498,39.802 20.283,39.802 20.213,39.872 20.213,41.331 v1(20.18,41.365) ; R209.2@20.71,1.727 20.732,1.748 20.732,2.698 v1@20.777,2.743 ; R241.2@21.438,34.188 21.844,34.595 21.844,40.894 21.373,41.365 v1(20.18,41.365)
  L4 (PWR) w0.254: v1(20.753,2.659) 21.573,3.48 30.785,3.48 32.918,1.346 34.468,1.346 37.363,4.242 ENC400.4@37.465,4.242 ; 25.349,46.025 33.577,46.025 34.421,45.181 v1(34.421,45.144)
  L6 (SIG/PWR) w0.254: C401.2@1.321,19.355 1.321,19.537 1.487,19.703 SW401.4@1.487,20.746 ; SW401.2@1.487,26.346 1.487,26.246 1.86,25.873 1.883,25.873 2.032,25.724 2.032,21.391 1.727,21.086 SW401.4@1.727,20.676 ; v1(5.793,54.09) 5.86,54.09 6.125,53.825 6.627,53.825 C403.2@6.706,53.746 ; C403.2@6.706,53.74 6.791,53.654 7.056,53.654 7.166,53.543 SW402.4@7.95,53.543 ; SW402.4@8.147,53.58 8.52,53.207 8.749,53.207 8.781,53.176 13.243,53.176 13.483,53.416 SW402.2@13.64,53.416 ; v1(15.038,17.332) 16.773,17.332 19.177,19.736 21.717,19.736 21.925,19.944 22.042,19.944 22.149,20.051 R301.2@22.149,20.168 ; v1(16.156,54.344) 16.602,53.898 16.645,53.898 16.746,53.797 C402.2@16.891,53.797 ; R419.1@16.35,29.632 R418.2@17.374,29.632 ; R417.2@16.434,40.335 16.477,40.378 R417.2@16.51,40.378 R414.2@18.466,40.378 18.516,40.378 18.639,40.501 18.639,40.551 19.452,41.365 ; C402.2@16.891,53.74 18.104,53.74 18.104,53.655 18.577,53.182 18.662,53.182 18.986,52.857 22.907,52.857 23.465,53.416 SW400.2@23.571,53.416 ; v1(17.295,28.831) 17.334,28.87 17.334,29.603 R418.2@17.374,29.642 ; R418.2@17.334,29.628 18.352,29.628 R415.2@18.415,29.566 ; C409.2@18.593,36.551 18.593,36.601 19.452,37.46 19.452,41.365 ; R208.2@22.571,36.339 R211.2@22.571,37.313 ; R211.2@22.581,37.313 22.581,38.964 v1(20.18,41.365) 19.452,41.365 ; v1(26.992,13.612) 26.992,13.546 27.182,13.356 27.182,12.848 27.085,12.751 R118.2@27.076,12.751 ; R405.2@38.659,3.65 38.609,3.65 38.153,4.105 37.703,4.105 ENC400.4@37.465,4.343 37.652,4.531 39.615,4.531 ; D400.5@39.726,5.709 39.726,3.437 R407.2@39.784,3.378
  other v1: 7.466,16.653 20.224,20.505 27.483,21.869 22.126,28.822 6.212,33.137 9.853,42.13 8.052,42.139 6.375,42.164
  other v2: 0.752,21.554
+3V9: C204.2 C211.2 C220.2 C232.2 L201.1 R200.2 R225.2 R244.2 R250.2 U200.6 U201.6 U204.1 U204.2 U206.1 U206.2 | length 58.4
  L1 (SIG/PWR) w0.254: 22.504,48.539 22.504,49.403 R250.2@23.063,49.962 ; 27.61,45.745 28.407,46.542 30.54,46.542 R200.2@30.582,46.584
  L4 (PWR) w0.254: v1(21.544,44.531) 28.57,44.531 28.981,44.12 40.488,44.12 ; v1(36.245,24.95) 40.488,29.193 40.488,44.12 ; v1(46.354,48.699) 46.354,46.557 43.917,44.12 40.488,44.12
  L6 (SIG/PWR) w0.381: v1(21.925,48.103) 21.925,48.569 23.698,50.343 25.121,50.343
+LED: C400.2 C413.2 J400.1 U400.6 | length 7.4
  L4 (PWR) w0.254: v1(5.653,37.35) 9.692,37.35 v1@12.04,35.002
  other v1: 12.054,34.988
-3V3: C108.2 C110.2 C125.2 C134.2 C135.2 C216.2 R220.2 R252.2 U100.4 U100.9 U101.4 U101.9 U102.4 U102.9 U103.4 U103.11 U203.10 U203.11 U203.12 | length 55
  L4 (PWR) w0.254: v1(41.123,42.367) 41.123,39.952 ; v1(41.377,39.091) 41.377,39.345 41.123,39.599 41.123,39.952 ; v1(44.12,32.106) 43.413,32.812 ; v1@44.167,32.059 44.421,32.059 44.956,31.523 44.969,31.523 45.085,31.407 v1@45.085,31.394 ; v1(45.158,31.4) 45.644,30.915 v1@45.644,30.15 ; v1(48.765,26.727) 48.765,27.635 ; U103.11@48.768,22.098 49.581,22.911 49.581,26.82 48.765,27.635 ; 41.123,39.952 41.684,39.952 42.164,39.472 42.164,37.567 41.859,37.262 41.859,34.366 43.413,32.812 ; 43.413,32.812 45.344,32.812 48.765,29.39 48.765,27.635
  L6 (SIG/PWR) w0.254: C108.2@40.234,40.945 40.234,41.986 40.992,42.745 41.202,42.745 42.037,41.91 44.78,41.91 45.898,43.028 46.187,43.028 ; R220.2@44.704,48.997 44.704,48.906 46.187,47.423 46.187,43.028 ; C110.2@49.115,41.596 49.115,41.683 49.201,41.769 49.288,41.769 49.448,41.928 49.448,43.911 49.936,44.399 R252.2@49.936,45.583 ; C110.2@49.142,41.656 47.771,43.028 46.187,43.028
  L6 (SIG/PWR) w0.508: 49.2,40.615 49.627,40.615 50.038,40.203 U101.9@50.038,40.157
  other v1: 45.666,30.156
-3V9: C205.2 C206.2 C218.2 L202.2 R201.2 R219.2 R249.2 U203.1 U203.2 | length 10.7
  L6 (SIG/PWR) w0.254: 27.153,44.247 27.153,43.518 27.369,43.302 27.419,43.302 27.542,43.179 R249.2@27.542,43.129 ; 30.963,44.704 34.391,48.133 38.811,48.133 C218.2@38.887,48.209
ADDR_DAC: B100.25 R135.1 | length 2.6
  L1 (SIG/PWR) w0.152: v1(32.359,37.235) 32.71,37.586 B100.25@33.452,37.586
  L6 (SIG/PWR) w0.152: v1(32.359,37.235) 32.72,36.874 32.72,36.361 32.835,36.246 R135.1@32.969,36.246
BAT+: C215.2 J200.1 U202.11 U202.12 | length 9
  L6 (SIG/PWR) w0.508: J200.1@3.964,10.79 4.193,10.79 7.794,7.188 C215.2@11.455,7.188
BOOT0: R301.1 R302.1 U301.5 | length 22.3
  L1 (SIG/PWR) w0.152: v1(24.256,22.375) 24.256,23.244 24.578,23.567 24.671,23.567 24.673,23.569 24.975,23.569 U301.5@25.009,23.603 ; R302.1@31.056,14.148 31.056,14.198 31.572,14.714 v2@31.572,14.961
  L6 (SIG/PWR) w0.152: R301.1@23.165,20.117 23.223,20.175 23.223,20.556 24.256,21.589 v1(24.256,22.375) ; v1@24.256,22.314 24.256,23.445 25.652,24.841 28.042,24.841 29.845,23.038 29.845,16.688 v2@31.551,14.982
  other v2: 31.56,15.01
BOOT_BQ: C207.2 U202.21 | length 2.6
  L6 (SIG/PWR) w0.254: U202.21@16.413,6.27 16.569,6.27 16.635,6.336 18.439,6.336 18.606,6.168 18.851,6.168 v1(18.898,6.121)
CD_SD: J401.CD R419.2 U301.41 | length 23.4
  L1 (SIG/PWR) w0.152: v1(15.113,18.644) 15.18,18.71 15.586,18.71 17.348,20.472 17.348,21.986 17.731,22.369 18.125,22.369 U301.41@18.159,22.403
  L3 (SIG) w0.152: v1@11.481,29.947 11.481,29.872 13.868,27.484 13.868,19.888 v1(15.113,18.644)
  L6 (SIG/PWR) w0.152: v1@11.43,30.048 12.015,30.634 14.861,30.634 14.877,30.65 16.248,30.65 R419.2@16.256,30.658
  other v1: 11.37,29.983
CE_BQ: R221.2 U202.1 U301.47 | length 32
  L1 (SIG/PWR) w0.152: v1(17.551,0.864) 18.517,0.864 R221.2@18.618,0.762 ; U301.47@20.584,21.178 20.584,21.701 20.828,21.946 v1(23.19,21.946)
  L3 (SIG) w0.152: v1(17.551,0.864) 17.983,1.295 17.983,11.862 23.19,17.069 v1(23.19,21.946)
  L6 (SIG/PWR) w0.152: U202.1@15.728,4.085 15.728,2.179 17.043,0.864 v1(17.551,0.864)
CHIP_PU: C309.2 R300.1 SW300.3 SW300.4 U301.4 | length 25.2
  L1 (SIG/PWR) w0.152: SW300.4@19.591,12.657 21.387,12.657 ; v1(20.599,15.799) 20.646,15.752 20.925,15.752 23.292,13.385 23.292,12.906 23.541,12.657 SW300.3@23.741,12.657 ; R300.1@21.412,14.046 21.387,14.021 21.387,12.657 ; SW300.3@23.47,12.657 21.387,12.657 ; U301.4@25.009,23.203 25.043,23.236 25.437,23.236 25.999,23.798 26.371,23.798 v1(26.411,23.838) ; v1@26.423,23.838 27.877,23.838 C309.2@27.889,23.851
  L6 (SIG/PWR) w0.152: v1(20.599,15.799) 23.317,15.799 24.198,16.68 24.198,20.439 26.411,22.651 v1(26.411,23.838)
CLK_SD: D401.6 J401.5 R305.1 | length 32.8
  L1 (SIG/PWR) w0.152: v1@16.053,18.11 16.639,18.696 R305.1@16.741,18.696
  L3 (SIG) w0.152: v1(10.322,29.036) 10.322,30.261 11.24,31.179 12.306,31.179 14.63,28.854 14.63,24.613 15.769,23.474 15.769,18.494 16.06,18.203 v1(16.06,18.109)
  L6 (SIG/PWR) w0.152: v1@10.287,29.134 10.287,30.91 14.411,35.034 14.861,35.034 15.068,34.826 15.999,34.826 16.916,33.909 18.881,33.909 19.294,34.322 19.294,34.431 19.509,34.646 D401.6@19.634,34.646
CMD_SD: D401.4 J401.3 R414.1 U301.43 | length 22.6
  L1 (SIG/PWR) w0.152: U301.43@18.984,21.178 18.984,22.014 19.075,22.106 v1(19.075,22.2)
  L3 (SIG) w0.152: v1(16.561,35.077) 16.561,24.653 19.014,22.2 v1(19.075,22.2)
  L3 (SIG) w0.203: v1(16.281,37.338) 16.281,37.258 16.561,36.978 v1(16.561,35.077)
  L6 (SIG/PWR) w0.203: J401.3@15.367,37.29 15.415,37.338 v1(16.281,37.338) 16.338,37.395 16.453,37.395 18.08,39.022 18.08,39.042 18.416,39.378 R414.1@18.466,39.378 ; v1(16.561,35.077) 16.641,35.077 16.864,34.855 D401.4@17.668,34.855
CS_LCD: J400.38 R413.2 U301.39 | length 15.5
  L1 (SIG/PWR) w0.152: J400.38@5.64,17.883 7.342,17.883 8.03,18.571 8.03,18.673 8.712,19.355 15.113,19.355 16.84,21.082 16.84,22.301 17.708,23.169 18.125,23.169 U301.39@18.159,23.203
D/CX_LCD: J400.36 U301.37 | length 14.6
  L1 (SIG/PWR) w0.152: J400.36@5.74,18.923 5.78,18.883 6.132,18.883 8.28,21.031 14.3,21.031 17.238,23.969 18.125,23.969 U301.37@18.159,24.003
DACL: B100.8 C107.2 R103.1 U101.6 | length 21.6
  L1 (SIG/PWR) w0.152: B100.8@36.452,40.386 42.062,40.386 42.709,41.032 v1@54.088,41.032
  L6 (SIG/PWR) w0.152: U101.6@51.7,39.741 52.543,39.741 52.807,40.005 C107.2@52.807,40.234 ; C107.2@52.937,40.186 53.11,40.013 54.084,40.013 R103.1@54.127,40.056 ; v1@54.077,41.021 54.156,40.941 R103.1@54.156,40.056
  other v1: 54.108,41.032
DACLB: B100.9 C101.2 R101.1 U101.2 | length 16.6
  L1 (SIG/PWR) w0.152: B100.9@36.452,40.786 40.76,40.786 41.732,41.758 v1(46.634,41.758)
  L6 (SIG/PWR) w0.152: R101.1@46.536,38.54 46.507,38.568 46.507,41.536 46.634,41.663 v1(46.634,41.758) ; R101.1@46.66,38.506 46.66,38.613 46.937,38.89 C101.2@47.679,38.89 48.307,38.89 48.609,39.192 48.997,39.192 U101.2@49.022,39.218
DACR: B100.3 C100.2 R100.1 U100.2 | length 4.4
  L1 (SIG/PWR) w0.152: B100.3@36.452,38.386 37.263,38.386 37.668,38.791 v1@37.668,38.862
  L6 (SIG/PWR) w0.152: v1@37.694,38.76 37.735,38.719 R100.1@37.735,38.012 38.554,38.012 38.71,38.168 C100.2@38.71,38.227 ; C100.2@38.878,38.312 38.97,38.405 U100.2@39.878,38.405
  other v1: 37.725,38.848
DACRB: B100.2 C106.2 R102.1 U100.6 | length 13.5
  L1 (SIG/PWR) w0.152: B100.2@36.452,37.986 41.872,37.986 44.145,40.259 v1(45.314,40.259)
  L6 (SIG/PWR) w0.152: U100.6@42.772,38.927 43.555,38.927 44.075,39.446 44.094,39.446 C106.2@44.161,39.513 ; C106.2@44.171,39.472 44.301,39.341 R102.1@45.279,39.341 45.314,39.376 v1(45.314,40.259)
DAT0_SD: D401.3 J401.7 R415.1 U301.40 | length 16.8
  L1 (SIG/PWR) w0.152: U301.40@18.159,22.803 18.167,22.811 18.597,22.811 19.025,23.238 v1@19.025,23.292
  L3 (SIG) w0.152: v1(18.711,31.394) 18.085,30.768 18.085,24.364 v1(19.032,23.418)
  L6 (SIG/PWR) w0.203: J401.7@14.861,32.834 16.088,32.834 ; D401.3@17.577,32.487 17.577,32.677 17.42,32.834 16.088,32.834 ; R415.1@18.313,30.709 18.267,30.755 18.166,30.755 17.953,30.968 17.953,30.981 17.772,31.162 17.759,31.162 16.088,32.834 ; R415.1@18.364,30.607 18.414,30.657 18.414,30.709 18.512,30.709 18.559,30.755 18.559,31.162 18.711,31.314 v1(18.711,31.394)
DATA1_DAC: B100.19 U301.16 | length 18.9
  L1 (SIG/PWR) w0.152: U301.16@23.784,28.028 23.818,28.061 23.818,28.363 23.82,28.366 23.82,28.458 23.968,28.607 24.363,28.607 25.095,29.339 25.095,36.398 28.683,39.986 B100.19@33.319,39.986
DATA2_DAC: B100.18 U301.17 | length 19.7
  L1 (SIG/PWR) w0.152: U301.17@23.384,28.028 23.415,28.059 23.415,28.571 24.257,29.413 24.257,36.678 27.941,40.362 33.428,40.362 B100.18@33.452,40.386
DATA_CLK_DAC: B100.20 U301.15 | length 17.8
  L1 (SIG/PWR) w0.152: U301.15@24.184,28.028 24.649,28.028 26.035,29.413 26.035,35.865 29.756,39.586 B100.20@33.452,39.586
DVDD: B100.15 C117.2
EN1_BQ: R209.1 U202.2 | length 8.2
  L1 (SIG/PWR) w0.152: v1(15.646,0.584) 15.693,0.631 16.125,0.631 17.221,1.727 R209.1@19.66,1.727
  L6 (SIG/PWR) w0.152: U202.2@15.228,4.085 15.228,1.003 v1(15.646,0.584)
EN2_BQ: R216.2 U202.3 | length 3.6
  L1 (SIG/PWR) w0.152: R216.2@14.292,0.457 14.292,1.369 14.447,1.524 v1@14.478,1.524
  L6 (SIG/PWR) w0.152: v1@14.478,1.738 14.478,3.594 14.684,3.8 14.684,4.041 U202.3@14.728,4.085
  other v1: 14.428,1.599
EN_DAC_LDO+: R244.1 R247.2 U206.3
EN_LDO+: R225.1 R231.2 U204.3
ENC_A_1: D400.1 ENC400.1 R400.1 R405.1 | length 10.9
  L6 (SIG/PWR) w0.203: R400.1@35.976,1.803 37.313,1.803 ENC400.1@37.313,1.854 ; ENC400.1@37.383,1.925 35.941,3.367 35.941,4.279 38.776,7.114 D400.1@38.776,8.109 ; ENC400.1@37.465,1.843 37.816,1.843 38.164,2.192 38.201,2.192 38.536,2.527 38.638,2.527 38.659,2.547 R405.1@38.659,2.65
ENC_B_1: D400.4 ENC400.3 R407.1 R408.2 | length 7.1
  L6 (SIG/PWR) w0.203: R407.1@40.676,3.353 40.676,2.587 41.42,1.843 ENC400.3@42.465,1.843 42.523,1.785 44.248,1.785 R408.2@44.306,1.727 ; D400.4@40.676,5.709 40.784,5.6 R407.1@40.784,3.378
FB_BB_3.3: C225.1 C226.1 R236.1 R240.2 U205.9
FB_BB_3.9: R200.1 R212.2 R213.2 U200.9 | length 2.3
  L1 (SIG/PWR) w0.203: U200.9@29.024,44.451 29.075,44.502 29.075,44.994 29.623,45.542 30.485,45.542 30.556,45.614 R200.1@30.556,45.618
GND: B100.11 B100.14 B100.22 B100.30 B100.31 C102.1 C103.1 C104.1 C105.1 C108.1 C109.1 C110.1 C111.1 C112.1 C113.1 C114.1 C115.1 C116.1 C117.1 C119.1 C120.1 C121.1 C122.1 C125.1 C126.1 C127.1 C128.1 C129.1 C130.1 C131.1 C132.2 C133.1 C134.1 C135.1 C136.1 C137.2 C139.1 C200.1 C202.1 C203.1 C204.1 C206.1 C208.1 C209.1 C210.1 C211.1 C213.1 C214.1 C215.1 C216.1 C217.1 C218.1 C219.1 C220.1 C221.1 C222.1 C223.2 C224.1 C227.1 C228.1 C229.1 C230.1 C231.1 C232.1 C233.2 C300.1 C301.1 C302.1 C303.1 C304.1 C305.1 C306.1 C307.1 C308.2 C309.1 C310.2 C311.1 C312.1 C400.1 C401.1 C402.1 C403.1 C404.1 C405.1 C407.1 C408.1 C409.1 C412.1 C413.1 CR300.2 CR300.4 D100.1 D201.C D202.3 D203.3 D205.A D206.C D207.C D208.A D209.C D400.2 D401.2 ENC400.2 J100.1 J100.SH1 J100.SH2 J100.SH3 J200.2 J200.4 J200.5 J201.A1 J201.A12 J201.B1 J201.B12 J201.S1 J201.S2 J201.S3 J201.S4 J400.11 J400.12 J400.13 J400.14 J400.15 J400.16 J400.17 J400.18 J400.19 J400.20 J400.21 J400.22 J400.23 J400.24 J400.25 J400.26 J400.27 J400.28 J400.29 J400.30 J400.31 J400.32 J400.43 J400.48 J400.49 J400.50 J401.6 J401.G1 J401.G2 J401.G3 J401.G4 Q400.2 R106.1 R107.1 R108.1 R111.1 R112.1 R113.1 R126.1 R129.1 R133.1 R135.2 R205.1 R207.1 R212.1 R215.1 R216.1 R217.1 R218.1 R221.1 R224.1 R226.1 R228.1 R229.1 R230.1 R231.1 R232.1 R233.1 R234.1 R235.1 R239.1 R240.1 R245.1 R246.1 R247.1 R248.1 R308.1 R401.1 R402.1 R403.1 R404.1 R406.1 R412.1 R413.1 R422.1 R424.1 R425.1 SW300.1 SW300.2 SW301.3 SW301.4 U100.3 U100.5 U101.3 U101.5 U103.3 U200.2 U200.5 U201.2 U202.4 U202.15 U202.16 U202.25 U203.9 U203.13 U204.8 U204.11 U205.2 U205.5 U206.8 U206.11 U300.4 U300.9 U301.57 U400.12 U400.17 Y100.2 Y101.2 | length 102.6
  L1 (SIG/PWR) w0.203: U400.12@8.89,36.855 8.89,36.17 9.271,35.789 U400.17@9.271,35.763 ; 17.124,10.465 SW300.1@23.741,10.465 ; v1@20.041,8.255 20.106,8.32 23.176,8.32 R235.1@23.19,8.334 ; C307.1@22.022,30.15 22.022,30.977 v1(22.094,30.977) ; R235.1@23.292,8.407 23.292,8.103 25.198,8.103 25.296,8.201 25.296,8.443 25.712,8.859 27.398,10.545 27.614,10.545 v3@27.788,10.719 ; SW300.1@23.741,10.507 23.941,10.507 v3@25.677,12.243 ; 25.6,13.005 25.679,13.005 ; C302.1@25.91,21.95 25.912,21.948 v1(26.645,21.946) v1@26.67,21.971 ; SW301.3@29.421,10.634 35.128,10.634 v2@35.128,10.846 ; C309.1@29.616,23.876 29.616,23.862 29.927,23.552 29.94,23.552 30.074,23.418 30.569,23.418 v1(30.626,23.361) ; v1(30.507,35.111) 31.581,35.111 C113.1@31.598,35.128 ; C105.1@30.836,31.814 30.836,31.765 31.134,31.466 31.907,31.466 v1(31.953,31.42) 31.966,31.432 31.966,32.245 C104.1@31.979,32.258 ; v1(31.726,36.33) 31.768,36.288 32.553,36.288 C112.1@32.595,36.246 ; B100.22@33.452,38.786 34.352,38.786 ccw(c34.352,39.386) B100.31@34.952,39.386 ; v2(34.493,32.442) 34.536,32.442 35.441,31.537 Y101.2@35.541,31.537 35.541,30.507 35.664,30.384 v1(35.664,30.304) v1(35.664,30.304) 34.689,30.303 R107.1@34.688,30.302 ; v1(34.519,40.818) 34.544,40.843 B100.14@34.544,41.783 ; B100.31@35.684,37.617 35.717,37.617 35.746,37.588 35.746,37.474 35.752,37.469 B100.30@35.752,36.886 ; B100.31@35.687,41.097 35.752,41.097 B100.11@35.752,41.886 ; v1(37.188,35.689) 37.244,35.746 37.244,36.075 37.632,36.463 C114.1@37.719,36.463 ; C103.1@38.227,30.607 38.868,30.607 ; Y100.2@38.483,33.524 38.483,33.574 38.782,33.872 39.384,33.872 v1(39.397,33.885) 39.422,33.861 39.422,33.054 R106.1@39.446,33.029 ; C115.1@38.811,35.471 38.975,35.308 v1(39.855,35.308) ; C102.1@38.824,29.515 38.824,30.562 v1(39.473,31.211) ; U204.11@40.03,23.266 40.056,23.241 U204.8@41.405,23.241
  L6 (SIG/PWR) w0.203: U202.4@14.228,4.085 14.228,4.851 U202.25@14.249,4.851 ; U202.15@14.228,7.955 14.228,7.184 U202.25@14.249,7.163 ; U202.16@14.728,7.955 14.728,7.218 U202.25@14.757,7.188 ; C408.1@17.374,37.001 17.424,37.052 17.424,37.49 v1@17.501,37.567 ; D202.3@26.455,0.737 26.553,0.835 26.553,1.179 26.568,1.193 28.321,1.193 v3@28.397,1.27 ; R234.1@28.372,2.689 28.408,2.653 28.408,1.234 v3@28.499,1.143 ; v1@31.852,31.42 31.953,31.521 31.953,34.196 32.745,34.989 32.745,35.039 32.894,35.187 R135.2@32.944,35.187 ; v1(36.704,28.417) 37.552,28.417 37.668,28.533 C130.1@37.668,28.753 ; v1@37.465,45.136 37.571,45.03 37.58,45.03 38.897,43.713 C216.1@38.897,43.663 ; v1@39.065,44.958 39.097,44.99 39.097,46.176 C218.1@39.167,46.246 ; v1@39.116,39.497 39.116,39.463 39.629,38.95 40.048,38.95 U100.3@40.072,38.927 ; v1@39.345,52.349 39.336,52.349 39.318,52.332 39.318,50.91 40.445,49.783 R226.1@40.445,49.733 ; v1@39.421,33.833 39.421,33.782 39.632,33.57 R133.1@39.632,32.461 ; C108.1@41.055,40.764 41.572,40.764 41.83,41.021 v1@41.935,41.021 ; v1(41.148,36.576) 41.159,36.587 41.921,36.587 C109.1@41.935,36.601 ; v1@41.707,32.36 41.726,32.379 42.606,32.379 C137.2@42.708,32.277 ; U203.13@42.055,45.72 U203.13@42.062,45.72 ; U100.5@42.772,39.427 42.947,39.427 42.971,39.45 42.971,40.101 v1(43.028,40.157) ; v1@42.774,52.705 42.773,52.704 42.773,51.224 43.655,50.342 R224.1@43.655,50.292 ; C136.1@42.835,33.858 42.835,34.158 43.083,34.407 43.655,34.407 43.817,34.569 v1@43.891,34.569 ; R232.1@43.705,42.748 43.733,42.776 44.604,42.776 v1@44.653,42.824 ; C222.1@44.129,43.84 44.131,43.842 45.108,43.842 v1@45.161,43.79 ; v1(44.161,45.8) 44.166,45.805 44.166,46.68 R230.1@44.247,46.761 ; v1@44.882,33.757 44.905,33.757 44.997,33.665 44.997,32.881 C125.1@44.983,32.868 ; v1(44.983,28.575) 45.641,28.575 45.644,28.578 C126.1@45.644,28.626 ; v1@45.187,24.673 46.205,24.673 C128.1@46.247,24.632 ; v1(45.187,24.714) C129.1@45.187,25.705 ; v1@46.33,17.348 46.37,17.307 47.121,17.307 C133.1@47.131,17.297 ; v1(46.559,35.047) 47.381,35.047 47.701,34.727 C131.1@47.701,34.62 ; v1(46.788,33.167) 46.831,33.124 47.673,33.124 C132.2@47.803,32.995 ; C133.1@47.153,17.435 47.153,18.316 R108.1@47.176,18.339 ; U103.3@47.804,23.473 v1@47.804,24.51 ; v1(47.986,40.169) 48.43,39.726 U101.3@48.844,39.726 ; v1@48.539,10.998 48.59,10.947 D100.1@48.59,10.285 ; C134.1@49.422,24.689 50.034,24.689 50.129,24.784 50.171,24.784 v1@50.19,24.765 ; v1(49.912,37.409) 49.935,37.386 50.727,37.386 C111.1@50.749,37.363 ; C110.1@49.965,41.596 50.015,41.645 50.015,42.395 v1@50.14,42.52 ; v1(50.267,24.841) 50.267,25.432 50.514,25.679 C135.1@50.521,25.679 ; R126.1@50.817,33.172 50.817,33.901 v1@50.851,33.934 ; v1@51.537,41.453 51.537,41.444 51.7,41.281 U101.5@51.7,40.241 ; R129.1@52.298,12.947 J100.1@53.454,12.947 ; C127.1@52.721,30.429 52.766,30.384 53.715,30.384 v1@53.721,30.378
  L6 (SIG/PWR) w0.254: U300.4@8.684,21.666 9.97,21.666 10.109,21.805 U300.9@10.109,21.819 ; U203.9@42.055,44.972 U203.13@42.055,45.72